# Altium PCB SKC_PCB.PcbDoc (part 1 of 3)
Units mm, origin at the board's own origin, x right, y up, seen from the top; angles counter-clockwise.
Board outline 160.02 x 100.08 mm, 2 copper layers (Top Layer, Bottom Layer); 399 components, 429 nets, 1319 pads, 182 vias.
Unrouted connection lines stored in the file: 43.
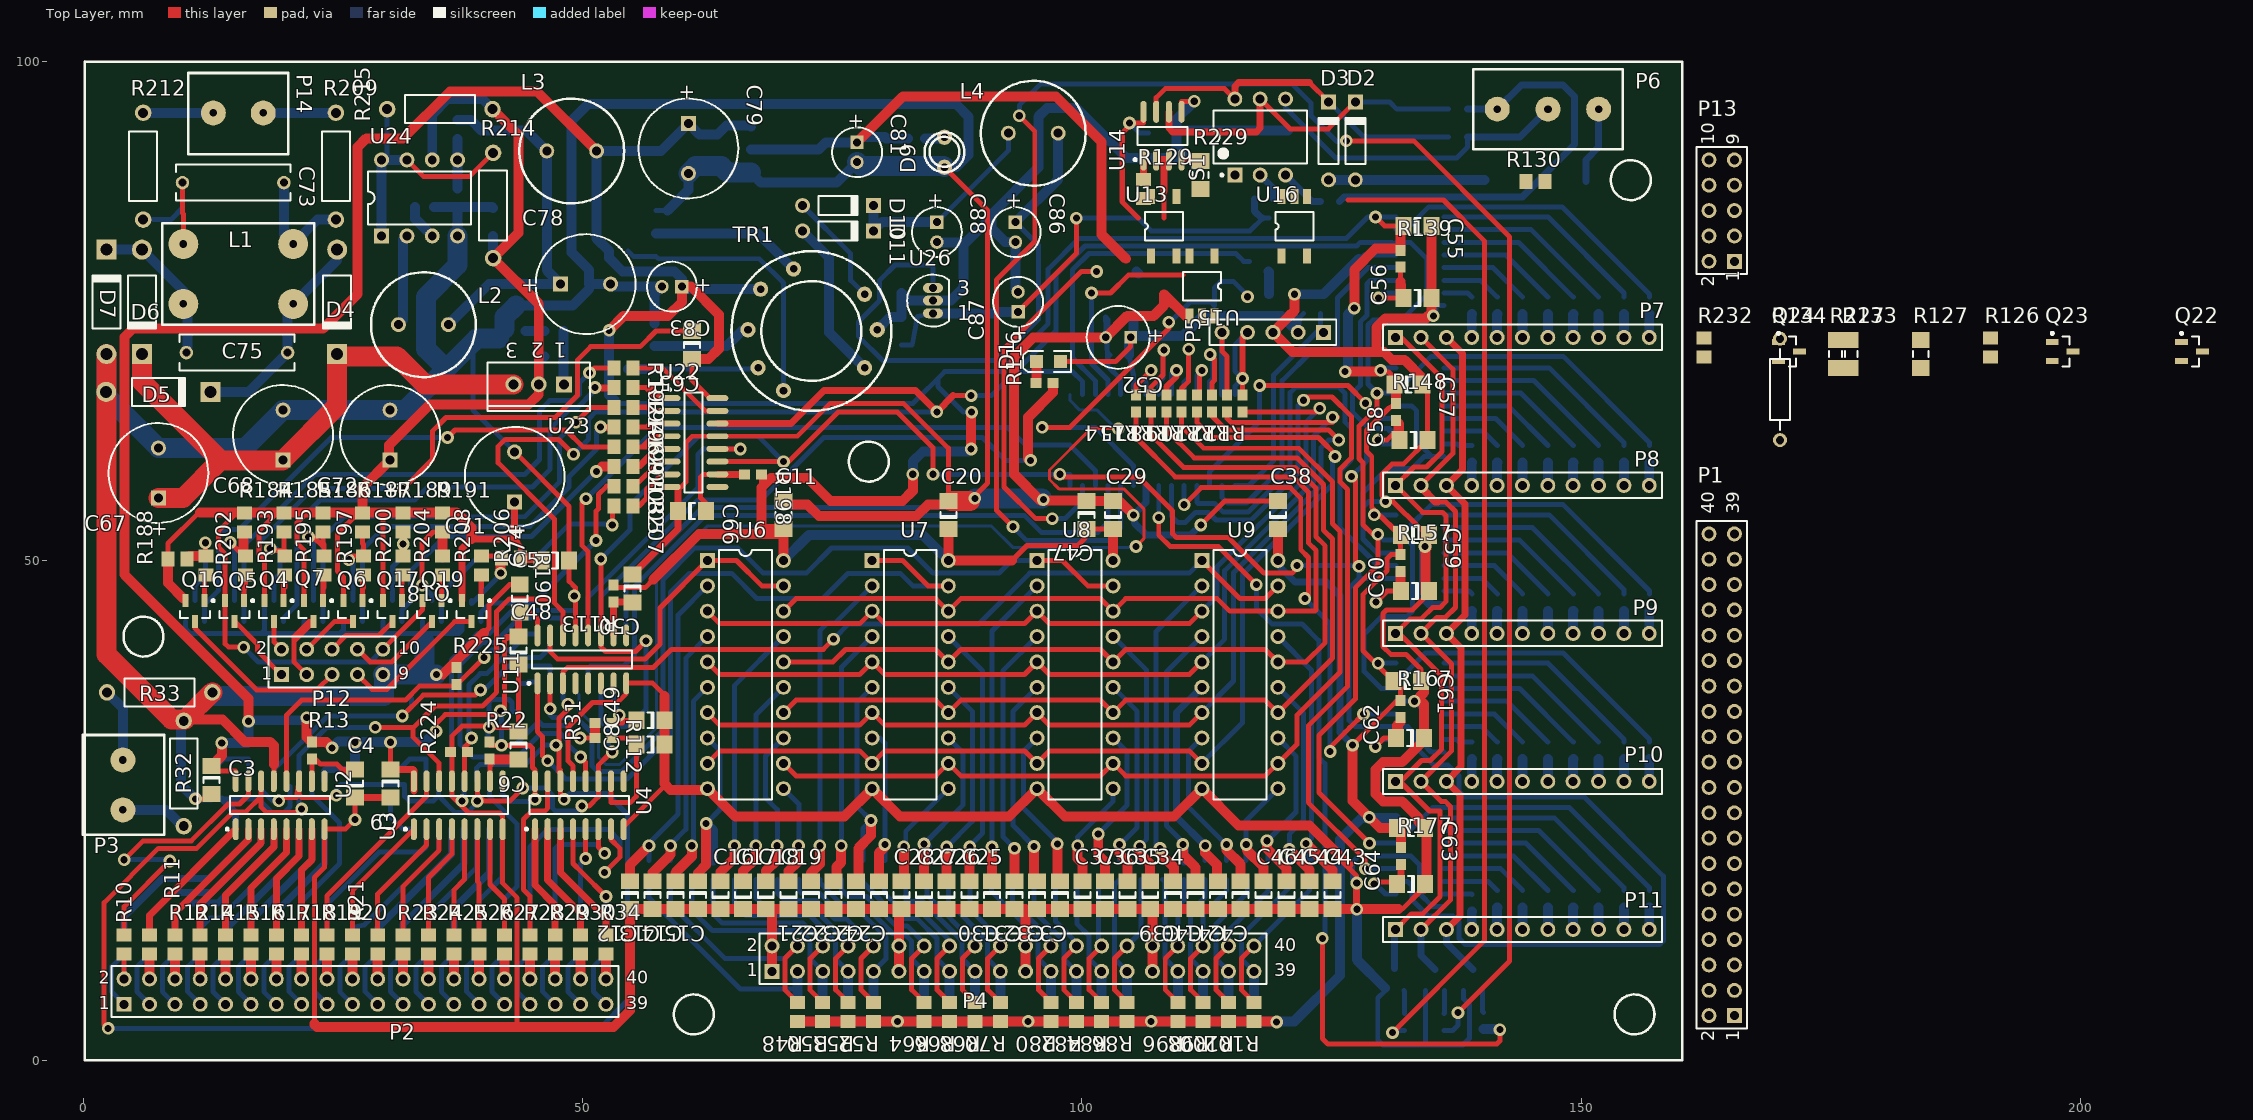
[diagram p0: Top Layer view]
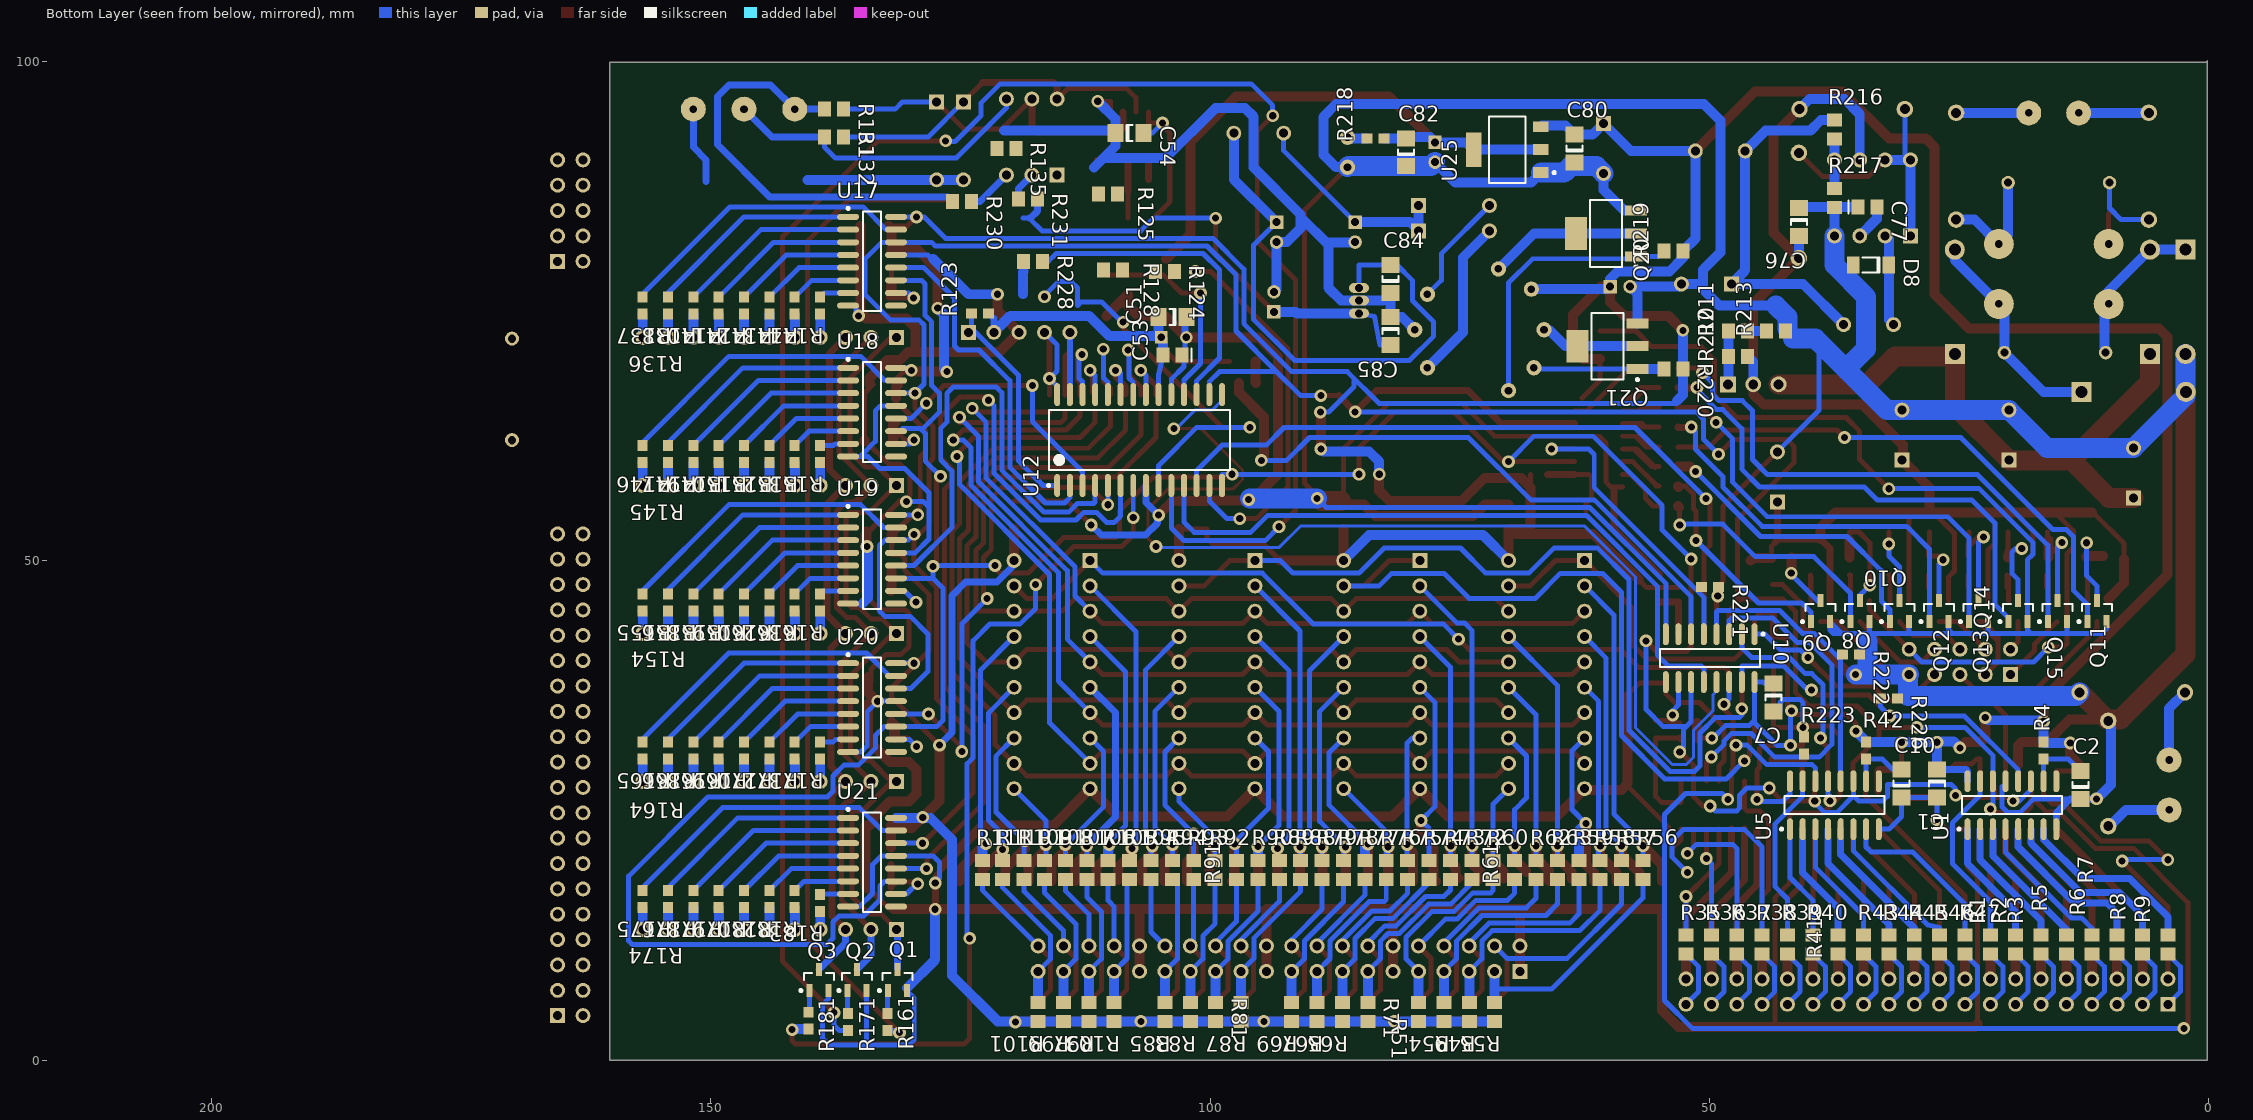
[diagram p1: Bottom Layer view, seen from below]

## Layer stack, top to bottom
Top Solder: solder mask 0.0102, Solder Resist, Dk 3.5
Top Layer: signal copper 0.0356
Dielectric1: dielectric 0.32, FR-4, Dk 4.8
Bottom Layer: signal copper 0.0356
Bottom Solder: solder mask 0.0102, Solder Resist, Dk 3.5

## Board outline
0.127,0 0.127,100.076 0.254,99.949 160.147,99.949 160.147,0 0.127,0

## Design rules (kind name [scope] priority, off if disabled: settings)
Clearance [All] p1: gap=0.254
PolygonConnect [All] p1: connectstyle=Relief reliefconductorwidth=0.254 reliefentries=4 polygonreliefangle="90 Angle" airgapwidth=0.254
RoutingVias [All] p1: holewidth=0.711 width=1.27 viastyle="Through Hole" minholewidth=0.711 minwidth=1.27 maxholewidth=0.711 maxwidth=1.27
SolderMaskExpansion [All] p1: expansion=0.102
Width [All] p1: maxlimit=3 minlimit=0.254 preferedwidth=0.7
29 further rules are at their usual default settings.

## Classes and differential pairs
component class SKC_ErrrorDisplay: C65 C66 P12 P13 Q4 Q5 Q6 Q7 Q8 Q9 Q10 Q11 Q12 Q13 Q14 Q15 Q16 Q17 Q18 Q19 R184 R185 R186 R187 R188 R189 R190 R191 R192 R193 R194 R195 R196 R197 R198 R199 R200 R201 R202 R203 R204 R205 R206 R207 R208 U22
component class SKC_Display: C55 C56 C57 C58 C59 C60 C61 C62 C63 C64 P7 P8 P9 P10 P11 Q1 Q2 Q3 R136 R137 R138 R139 R140 R141 R142 R143 R144 R145 R146 R147 R148 R149 R150 R151 R152 R153 R154 R155 R156 R157 R158 R159 R160 R161 R162 R163 R164 R165 R166 R167 R168 R169 R170 R171 R172 R173 R174 R175 R176 R177 R178 R179 R180 R181 R182 R183 U17 U18 U19 U20 U21
component class SKC_DataComm: C54 D2 D3 P6 Q22 Q23 Q24 R124 R125 R128 R129 R130 R131 R132 R135 R227 R228 R229 R230 R231 S1 U13 U14 U15 U16
component class SignalOutput: C1 C2 C3 C4 C5 C6 C7 C8 C9 C10 P1 P2 P3 R1 R2 R3 R4 R5 R6 R7 R8 R9 R10 R11 R12 R13 R14 R15 R16 R17 R18 R19 R20 R21 R22 R23 R24 R25 R26 R27 R28 R29 R30 R31 R32 R33 R34 R35 R36 R37 R38 R39 R40 R41 R42 R43 R44 R45 R46 R47 U1 U2 U3 U4 U5
component class SignalAndKeyController: C47 C48 C49 C50 C51 C52 C53 D1 P5 R112 R113 R114 R115 R116 R117 R118 R119 R120 R121 R122 R123 R221 R222 R223 R224 R225 R226 U10 U11 U12
component class KeyInput: C11 C12 C13 C14 C15 C16 C17 C18 C19 C20 C21 C22 C23 C24 C25 C26 C27 C28 C29 C30 C31 C32 C33 C34 C35 C36 C37 C38 C39 C40 C41 C42 C43 C44 C45 C46 P4 R48 R49 R50 R51 R52 R53 R54 R55 R56 R57 R58 R59 R60 R61 R62 R63 R64 R65 R66 R67 R68 R69 R70 R71 R72 R73 R74 R75 R76 R77 R78 R79 R80 R81 R82 R83 R84 R85 R86 R87 R88 R89 R90 R91 R92 R93 R94 R95 R96 R97 R98 R99 R100 R101 R102 R103 R104 R105 R106 R107 R108 R109 R110 R111 U6 U7 U8 U9
component class SKC_PSU: C67 C68 C71 C72 C73 C74 C75 C76 C77 C78 C79 C80 C81 C82 C83 C84 C85 C86 C87 C88 D4 D5 D6 D7 D8 D9 D10 D11 L1 L2 L3 L4 P14 Q20 Q21 R209 R210 R211 R212 R213 R214 R215 R216 R217 R218 R219 R220 TR1 U23 U24 U25 U26

## Components (designator, comment, footprint, x,y, rotation, side; value= is the part's Value field where it differs from the comment)
C1 "" 1206 27.178,27.686 r270 bottom
C2 "" 1206 12.827,27.559 r90 bottom
C3 "" 1206 12.827,28.067 r270 top
C4 "" 1206 27.178,27.686 r90 top
C5 "" 1206 43.688,46.228 r90 top
C6 "" 1206 43.561,31.496 r270 top
C7 "" 1206 43.561,36.322 r270 bottom
C8 "" 1206 56.769,31.623 r180 top
C9 "" 1206 30.734,27.686 r270 top
C10 "" 1206 30.734,27.686 r90 bottom
C11 "" 1206 70.104,54.61 r90 top
C12 "" 1206 54.737,16.51 r270 top
C13 "" 1206 57.003,16.51 r270 top
C14 "" 1206 59.268,16.51 r270 top
C15 "" 1206 61.534,16.51 r270 top
C16 "" 1206 63.799,16.51 r90 top
C17 "" 1206 66.065,16.51 r90 top
C18 "" 1206 68.33,16.51 r90 top
C19 "" 1206 70.596,16.51 r90 top
C20 "" 1206 86.614,54.61 r90 top
C21 "" 1206 72.861,16.51 r270 top
C22 "" 1206 75.127,16.51 r270 top
C23 "" 1206 77.392,16.51 r270 top
C24 "" 1206 79.658,16.51 r270 top
C25 "" 1206 88.72,16.51 r90 top
C26 "" 1206 86.454,16.51 r90 top
C27 "" 1206 84.189,16.51 r90 top
C28 "" 1206 81.923,16.51 r90 top
C29 "" 1206 103.124,54.61 r90 top
C30 "" 1206 90.985,16.51 r270 top
C31 "" 1206 93.251,16.51 r270 top
C32 "" 1206 95.516,16.51 r270 top
C33 "" 1206 97.782,16.51 r270 top
C34 "" 1206 106.844,16.51 r90 top
C35 "" 1206 104.578,16.51 r90 top
C36 "" 1206 102.313,16.51 r90 top
C37 "" 1206 100.047,16.51 r90 top
C38 "" 1206 119.634,54.61 r90 top
C39 "" 1206 109.109,16.51 r270 top
C40 "" 1206 111.375,16.51 r270 top
C41 "" 1206 113.64,16.51 r270 top
C42 "" 1206 115.906,16.51 r270 top
C43 "" 1206 125.095,16.51 r90 top
C44 "" 1206 122.798,16.51 r90 top
C45 "" 1206 120.5,16.51 r90 top
C46 "" 1206 118.203,16.51 r90 top
C47 "" 1206 100.457,54.61 r270 top
C48 "" 1206 43.561,41.021 r90 top
C49 "" 1206 56.769,34.036 r180 top
C50 "" 1206 54.991,47.244 r270 top
C51 "" 1206 103.759,74.422 r0 bottom
C52 "4u7" C 103.632,72.39 r180 top
C53 "" 0805 103.759,70.612 r0 bottom
C54 "100nF" 1206 108.077,92.837 r180 bottom
C55 "" 1206 133.604,83.566 r0 top
C56 "" 1206 133.604,76.327 r180 top
C57 "" 1206 132.715,67.691 r0 top
C58 "" 1206 133.223,62.103 r180 top
C59 "" 1206 133.35,52.578 r0 top
C60 "" 1206 133.35,46.99 r180 top
C61 "" 1206 132.588,37.973 r0 top
C62 "" 1206 132.842,32.258 r180 top
C63 "" 1206 132.969,23.241 r0 top
C64 "" 1206 132.969,17.653 r180 top
C65 "" 1206 60.96,71.628 r270 top
C66 "" 1206 60.96,54.991 r0 top
C67 "470uF" CAPPR5-10X16 7.493,58.801 r90 top
C68 "470uF" CAPPR5-10X16 19.981,62.611 r90 top
C71 "470uF" CAPPR5-10X16 43.18,58.42 r90 top
C72 "470uF" CAPPR5-10X16 30.692,62.611 r90 top
C73 "100nF" VP60-3.6 14.986,87.884 r0 top
C74 "" 1206 47.244,50.038 r180 top
C75 "220nF" VP60-3.6 15.367,70.866 r0 top
C76 "" 1206 41.021,83.947 r270 bottom
C77 "" 0805 34.163,85.471 r180 bottom
C78 "470uF" CAPPR5-10X16 50.292,77.724 r0 top
C79 "470uF" CAPPR5-10X16 60.579,91.313 r270 top
C80 "" 1206 63.5,91.313 r90 bottom
C81 "100uF" CAPPR2-5X11 77.47,90.932 r270 top
C82 "" 1206 80.391,90.932 r90 bottom
C83 "100uF" CAPPR2-5X11 58.928,77.47 r180 top
C84 "" 1206 81.915,78.232 r90 bottom
C85 "" 1206 81.915,73.025 r270 bottom
C86 "100uF" CAPPR2-5X11 93.345,82.931 r270 top
C87 "100uF" CAPPR2-5X11 93.599,75.946 r90 top
C88 "100uF" CAPPR2-5X11 85.471,82.931 r270 top
D1 "SKC_STATUS" 2.0X1.25X0.8 96.647,69.977 r180 top
D2 "13V" DO-35A 127.381,92.075 r90 top
D3 "13V" DO-35A 124.714,92.075 r90 top
D4 "1N4001" DO-41 25.4,75.946 r270 top
D5 "1N4001" DO-41 7.493,66.929 r0 top
D6 "1N4001" DO-41 5.842,75.946 r270 top
D7 "1N4001" DO-41 2.286,75.946 r90 top
D8 "BAV102" SOD80C 33.782,79.629 r180 bottom
D9 "3V3 POWER OK" "LED 3mm" 86.233,90.932 r90 top
D10 "1N4148" DO-35 75.565,85.598 r0 top
D11 "1N4148" DO-35 75.565,83.058 r0 top
L1 "CMC filter" "MREZNI FILTER" 15.494,78.74 r0 top
L2 "" RB5-10.5 34.036,73.66 r0 top
L3 "" RB5-10.5 48.895,91.059 r0 top
L4 "" RB5-10.5 95.123,92.837 r0 top
P1 "Header 20X2" HDR2X20 165.354,4.445 r90 top
P2 "Header 20X2" HDR2X20 4.064,5.588 r0 top
P3 "" "TERMINAL BLOK 2" 3.937,27.559 r0 top
P4 "Header 20X2" HDR2X20 68.961,8.89 r0 top
P5 "PICKIT3" HDR1X5 124.206,72.898 r180 top
P6 "RS485" "TERMINAL BLOK 3" 146.685,95.25 r270 top
P7 "DISPLAY 1" HDR1X11 131.428,72.39 r0 top
P8 "DISPLAY 2" HDR1X11 131.428,57.563 r0 top
P9 "DISPLAY 3" HDR1X11 131.428,42.735 r0 top
P10 "DISPLAY 4" HDR1X11 131.428,27.908 r0 top
P11 "DISPLAY 5" HDR1X11 131.428,13.081 r0 top
P12 "ERROR DISPLAY" HDR2X5 19.812,38.608 r0 top
P13 "ERROR DISPLAY" HDR2X5 165.354,80.01 r90 top
P14 "POWER" "TERMINAL BLOK 2" 15.494,94.869 r270 top
Q1 "BC817" SOT23_N 131.318,8.001 r90 bottom
Q2 "BC817" SOT23_N 135.382,8.001 r90 bottom
Q3 "BC817" SOT23_N 139.192,8.001 r90 bottom
Q4 "BC807" SOT23_N 19.086,44.958 r270 top
Q5 "BC807" SOT23_N 15.131,44.958 r270 top
Q6 "BC807" SOT23_N 26.997,44.958 r270 top
Q7 "BC807" SOT23_N 23.041,44.958 r270 top
Q8 "BC817" SOT23_N 34.907,44.958 r90 bottom
Q9 "BC817" SOT23_N 38.862,44.958 r90 bottom
Q10 "BC817" SOT23_N 30.952,44.958 r90 bottom
Q11 "BC817" SOT23_N 11.176,44.958 r90 bottom
Q12 "BC817" SOT23_N 26.997,44.958 r90 bottom
Q13 "BC817" SOT23_N 23.041,44.958 r90 bottom
Q14 "BC817" SOT23_N 19.086,44.958 r90 bottom
Q15 "BC817" SOT23_N 15.131,44.958 r90 bottom
Q16 "BC807" SOT23_N 11.176,44.958 r270 top
Q17 "BC807" SOT23_N 30.952,44.958 r270 top
Q18 "BC807" SOT23_N 38.862,44.958 r270 top
Q19 "BC807" SOT23_N 34.907,44.958 r270 top
Q20 "BCP56-10" SOT223_N 60.325,82.804 r0 bottom
Q21 "BCP56-10" SOT223_N 60.198,71.501 r0 bottom
Q22 "BC807-16" SOT23_N 211.201,70.993 r0 top
Q23 "BC807-16" SOT23_N 198.247,70.993 r0 top
Q24 "BC807" SOT23_N 170.815,70.993 r0 top
R1 "330R" ERA-0805 21.844,11.557 r90 bottom
R2 "330R" ERA-0805 19.304,11.557 r90 bottom
R3 "330R" ERA-0805 16.764,11.557 r90 bottom
R4 "100K" ERA-0603 16.51,30.988 r90 bottom
R5 "330R" ERA-0805 14.224,11.557 r90 bottom
R6 "330R" ERA-0805 11.684,11.557 r90 bottom
R7 "330R" ERA-0805 9.144,11.557 r90 bottom
R8 "330R" ERA-0805 6.604,11.557 r90 bottom
R9 "330R" ERA-0805 4.064,11.557 r90 bottom
R10 "330R" ERA-0805 4.064,11.557 r90 top
R11 "330R" ERA-0805 6.604,11.557 r90 top
R12 "330R" ERA-0805 9.144,11.557 r90 top
R13 "100K" ERA-0603 22.86,30.988 r90 top
R14 "330R" ERA-0805 11.684,11.557 r90 top
R15 "330R" ERA-0805 14.224,11.557 r90 top
R16 "330R" ERA-0805 16.764,11.557 r90 top
R17 "330R" ERA-0805 19.304,11.557 r90 top
R18 "330R" ERA-0805 21.844,11.557 r90 top
R19 "330R" ERA-0805 24.384,11.557 r90 top
R20 "330R" ERA-0805 26.924,11.557 r90 top
R21 "330R" ERA-0805 29.464,11.557 r90 top
R22 "100K" ERA-0603 40.64,30.988 r90 top
R23 "330R" ERA-0805 32.004,11.557 r90 top
R24 "330R" ERA-0805 34.544,11.557 r90 top
R25 "330R" ERA-0805 37.084,11.557 r90 top
R26 "330R" ERA-0805 39.624,11.557 r90 top
R27 "330R" ERA-0805 42.164,11.557 r90 top
R28 "330R" ERA-0805 44.704,11.557 r90 top
R29 "330R" ERA-0805 47.244,11.557 r90 top
R30 "330R" ERA-0805 49.784,11.557 r90 top
R31 "100K" ERA-0603 52.07,32.258 r180 top
R32 "15R" RD6.35x2.3 10.033,28.702 r270 top
R33 "15R" RD6.35x2.3 7.62,36.83 r0 top
R34 "330R" ERA-0805 52.324,11.557 r90 top
R35 "330R" ERA-0805 52.324,11.557 r90 bottom
R36 "330R" ERA-0805 49.784,11.557 r90 bottom
R37 "330R" ERA-0805 47.244,11.557 r90 bottom
R38 "330R" ERA-0805 44.704,11.557 r90 bottom
R39 "330R" ERA-0805 42.164,11.557 r90 bottom
R40 "330R" ERA-0805 39.624,11.557 r90 bottom
R41 "330R" ERA-0805 37.084,11.557 r90 bottom
R42 "100K" ERA-0603 34.29,30.988 r90 bottom
R43 "330R" ERA-0805 34.544,11.557 r90 bottom
R44 "330R" ERA-0805 32.004,11.557 r90 bottom
R45 "330R" ERA-0805 29.464,11.557 r90 bottom
R46 "330R" ERA-0805 26.924,11.557 r90 bottom
R47 "330R" ERA-0805 24.384,11.557 r90 bottom
R48 "10K" ERA-0805 71.501,4.826 r270 top
R49 "10K" ERA-0805 74.005,4.826 r270 bottom
R50 "10K" ERA-0805 74.005,4.826 r270 top
R51 "10K" ERA-0805 79.121,4.826 r270 bottom
R52 "10K" ERA-0805 79.121,4.826 r270 top
R53 "10K" ERA-0805 76.581,4.826 r270 top
R54 "10K" ERA-0805 76.581,4.826 r270 bottom
R55 "10K" ERA-0805 71.501,4.826 r270 bottom
R56 "10K" ERA-0805 56.642,19.05 r90 bottom
R57 "10K" ERA-0805 58.785,19.05 r90 bottom
R58 "10K" ERA-0805 60.927,19.05 r90 bottom
R59 "10K" ERA-0805 63.07,19.05 r90 bottom
R60 "10K" ERA-0805 71.64,19.05 r90 bottom
R61 "10K" ERA-0805 69.498,19.05 r90 bottom
R62 "10K" ERA-0805 67.355,19.05 r90 bottom
R63 "10K" ERA-0805 65.212,19.05 r90 bottom
R64 "10K" ERA-0805 84.201,4.826 r270 top
R65 "10K" ERA-0805 86.741,4.826 r270 bottom
R66 "10K" ERA-0805 86.741,4.826 r270 top
R67 "10K" ERA-0805 89.281,4.826 r270 bottom
R68 "10K" ERA-0805 89.281,4.826 r270 top
R69 "10K" ERA-0805 91.821,4.826 r270 bottom
R70 "10K" ERA-0805 91.821,4.826 r270 top
R71 "10K" ERA-0805 84.201,4.826 r270 bottom
R72 "10K" ERA-0805 73.783,19.05 r90 bottom
R73 "10K" ERA-0805 75.926,19.05 r90 bottom
R74 "10K" ERA-0805 78.068,19.05 r90 bottom
R75 "10K" ERA-0805 80.211,19.05 r90 bottom
R76 "10K" ERA-0805 82.353,19.05 r90 bottom
R77 "10K" ERA-0805 84.496,19.05 r90 bottom
R78 "10K" ERA-0805 86.639,19.05 r90 bottom
R79 "10K" ERA-0805 88.781,19.05 r90 bottom
R80 "10K" ERA-0805 96.901,4.826 r270 top
R81 "10K" ERA-0805 99.441,4.826 r270 bottom
R82 "10K" ERA-0805 99.441,4.826 r270 top
R83 "10K" ERA-0805 101.981,4.826 r270 bottom
R84 "10K" ERA-0805 101.981,4.826 r270 top
R85 "10K" ERA-0805 104.521,4.826 r270 bottom
R86 "10K" ERA-0805 104.521,4.826 r270 top
R87 "10K" ERA-0805 96.901,4.826 r270 bottom
R88 "10K" ERA-0805 90.924,19.05 r90 bottom
R89 "10K" ERA-0805 93.066,19.05 r90 bottom
R90 "10K" ERA-0805 95.209,19.05 r90 bottom
R91 "10K" ERA-0805 97.352,19.05 r90 bottom
R92 "10K" ERA-0805 99.494,19.05 r90 bottom
R93 "10K" ERA-0805 101.637,19.05 r90 bottom
R94 "10K" ERA-0805 103.779,19.05 r90 bottom
R95 "10K" ERA-0805 105.922,19.05 r90 bottom
R96 "10K" ERA-0805 109.601,4.826 r270 top
R97 "10K" ERA-0805 112.141,4.826 r270 bottom
R98 "10K" ERA-0805 112.141,4.826 r270 top
R99 "10K" ERA-0805 114.681,4.826 r270 bottom
R100 "10K" ERA-0805 114.681,4.826 r270 top
R101 "10K" ERA-0805 117.221,4.826 r270 bottom
R102 "10K" ERA-0805 117.221,4.826 r270 top
R103 "10K" ERA-0805 109.601,4.826 r270 bottom
R104 "10K" ERA-0805 108.065,19.05 r90 bottom
R105 "10K" ERA-0805 110.207,19.05 r90 bottom
R106 "10K" ERA-0805 112.35,19.05 r90 bottom
R107 "10K" ERA-0805 114.493,19.05 r90 bottom
R108 "10K" ERA-0805 116.586,19.05 r90 bottom
R109 "10K" ERA-0805 118.618,19.05 r90 bottom
R110 "10K" ERA-0805 120.777,19.05 r90 bottom
R111 "10K" ERA-0805 122.809,19.05 r90 bottom
R112 "100K" ERA-0603 52.07,33.782 r0 top
R113 "100K" ERA-0603 53.086,46.736 r270 top
R114 "1K" ERA-0603 105.41,65.786 r270 top
R115 "1K" ERA-0603 106.934,65.786 r270 top
R116 "330R" ERA-0603 96.266,67.818 r180 top
R117 "1K" ERA-0603 108.458,65.786 r270 top
R118 "1K" ERA-0603 109.982,65.786 r270 top
R119 "1K" ERA-0603 111.506,65.786 r270 top
R120 "1K" ERA-0603 113.03,65.786 r270 top
R121 "1K" ERA-0603 114.554,65.786 r270 top
R122 "1K" ERA-0603 116.078,65.786 r270 top
R123 "10K" ERA-0603 123.063,74.803 r0 bottom
R124 "4K7" ERA-0805 104.521,78.994 r180 bottom
R125 "2K2" ERA-0805 110.236,86.741 r180 bottom
R126 "330R" ERA-0805 191.008,71.374 r90 top
R127 "2K2" 8-1206 184.023,70.739 r90 top
R128 "4K7" ERA-0805 109.728,79.121 r180 bottom
R129 "220R" ERA-0805 106.172,87.249 r90 top
R130 "2K2" ERA-0805 145.415,88.011 r0 top
R131 "47R" ERA-0805 137.668,95.25 r180 bottom
R132 "47R" ERA-0805 137.668,92.456 r180 bottom
R133 "2K2" 8-1206 176.911,70.739 r90 top
R134 "100R" AXIAL-0.4 169.926,67.183 r90 top
R135 "4K7" ERA-0805 120.396,91.313 r180 bottom
R136 "100R" ERA-0603 156.845,75.565 r270 bottom
R137 "100R" ERA-0603 154.305,75.565 r270 bottom
R138 "100R" ERA-0603 151.765,75.565 r270 bottom
R139 "100K" ERA-0603 131.904,80.264 r90 top
R140 "100R" ERA-0603 149.225,75.565 r270 bottom
R141 "100R" ERA-0603 146.685,75.565 r270 bottom
R142 "100R" ERA-0603 144.145,75.565 r270 bottom
R143 "100R" ERA-0603 141.605,75.565 r270 bottom
R144 "100R" ERA-0603 139.065,75.565 r270 bottom
R145 "100R" ERA-0603 156.845,60.706 r270 bottom
R146 "100R" ERA-0603 154.305,60.706 r270 bottom
R147 "100R" ERA-0603 151.765,60.706 r270 bottom
R148 "100K" ERA-0603 131.445,64.897 r90 top
R149 "100R" ERA-0603 149.225,60.706 r270 bottom
R150 "100R" ERA-0603 146.685,60.706 r270 bottom
R151 "100R" ERA-0603 144.145,60.706 r270 bottom
R152 "100R" ERA-0603 141.605,60.706 r270 bottom
R153 "100R" ERA-0603 139.065,60.706 r270 bottom
R154 "100R" ERA-0603 156.845,45.847 r270 bottom
R155 "100R" ERA-0603 154.305,45.847 r270 bottom
R156 "100R" ERA-0603 151.765,45.847 r270 bottom
R157 "100K" ERA-0603 131.904,49.784 r90 top
R158 "100R" ERA-0603 149.225,45.847 r270 bottom
R159 "100R" ERA-0603 146.685,45.847 r270 bottom
R160 "100R" ERA-0603 144.145,45.847 r270 bottom
R161 "3K3" ERA-0603 132.334,3.81 r270 bottom
R162 "100R" ERA-0603 141.605,45.847 r270 bottom
R163 "100R" ERA-0603 139.065,45.847 r270 bottom
R164 "100R" ERA-0603 156.845,30.988 r270 bottom
R165 "100R" ERA-0603 154.305,30.988 r270 bottom
R166 "100R" ERA-0603 151.765,30.988 r270 bottom
R167 "100K" ERA-0603 131.904,35.179 r90 top
R168 "100R" ERA-0603 149.225,30.988 r270 bottom
R169 "100R" ERA-0603 146.685,30.988 r270 bottom
R170 "100R" ERA-0603 144.145,30.988 r270 bottom
R171 "3K3" ERA-0603 136.271,3.81 r270 bottom
R172 "100R" ERA-0603 141.605,30.988 r270 bottom
R173 "100R" ERA-0603 139.065,30.988 r270 bottom
R174 "100R" ERA-0603 156.845,16.129 r270 bottom
R175 "100R" ERA-0603 154.305,16.129 r270 bottom
R176 "100R" ERA-0603 151.765,16.129 r270 bottom
R177 "100K" ERA-0603 131.953,20.447 r90 top
R178 "100R" ERA-0603 149.225,16.129 r270 bottom
R179 "100R" ERA-0603 146.685,16.129 r270 bottom
R180 "100R" ERA-0603 144.145,16.129 r270 bottom
R181 "3K3" ERA-0603 140.208,3.937 r270 bottom
R182 "100R" ERA-0603 141.605,16.129 r270 bottom
R183 "100R" ERA-0603 139.065,15.748 r270 bottom
R184 "22K" ERA-0805 16.129,53.848 r90 top
R185 "22K" ERA-0805 20.066,53.848 r90 top
R186 "22K" ERA-0805 24.003,53.848 r90 top
R187 "22K" ERA-0805 27.94,53.848 r90 top
R188 "22K" ERA-0805 9.398,50.165 r180 top
R189 "22K" ERA-0805 32.004,53.848 r90 top
R190 "22K" ERA-0805 42.799,50.292 r0 top
R191 "22K" ERA-0805 35.941,53.848 r90 top
R192 "1K" ERA-0805 54.102,69.342 r0 top
R193 "10K" ERA-0805 16.205,49.53 r90 top
R194 "1K" ERA-0805 54.102,67.364 r0 top
R195 "10K" ERA-0805 20.151,49.53 r90 top
R196 "1K" ERA-0805 54.102,65.387 r0 top
R197 "10K" ERA-0805 24.096,49.53 r90 top
R198 "100K" ERA-0603 67.056,58.674 r0 top
R199 "1K" ERA-0805 54.102,63.409 r0 top
R200 "10K" ERA-0805 28.042,49.53 r90 top
R201 "1K" ERA-0805 54.102,61.432 r0 top
R202 "10K" ERA-0805 12.26,49.53 r90 top
R203 "1K" ERA-0805 54.102,59.454 r0 top
R204 "10K" ERA-0805 31.987,49.53 r90 top
R205 "1K" ERA-0805 54.102,57.477 r0 top
R206 "10K" ERA-0805 39.878,49.53 r90 top
R207 "1K" ERA-0805 54.102,55.499 r0 top
R208 "10K" ERA-0805 35.933,49.53 r90 top
R209 "1R" R6.35x2.3 25.273,89.535 r90 top
R210 "240R" ERA-0805 47.117,70.485 r0 bottom
R211 "2K" ERA-0805 47.117,73.025 r0 bottom
R212 "1R" R6.35x2.3 5.969,89.535 r90 top
R213 "2K2" ERA-0805 43.307,73.025 r0 bottom
R214 "0R47" RD6.35x2.3 41.021,85.598 r90 top
R215 "0R47" RD6.35x2.3 35.687,95.25 r180 top
R216 "3K6" ERA-0805 37.465,93.218 r90 bottom
R217 "1k2" ERA-0805 37.465,86.36 r90 bottom
R218 "330R" ERA-0603 83.439,92.329 r0 bottom
R219 "10K" ERA-0805 53.594,81.026 r0 bottom
R220 "10K" ERA-0805 53.594,69.215 r180 bottom
R221 "2K" ERA-0603 49.911,47.371 r180 bottom
R222 "2K" ERA-0603 35.814,40.64 r180 bottom
R223 "2K" ERA-0603 40.513,31.496 r90 bottom
R224 "2K" ERA-0603 37.592,30.861 r180 top
R225 "2K" ERA-0603 37.338,38.481 r90 top
R226 "2K" ERA-0603 32.004,36.195 r180 bottom
R227 "2K2" 8-1206 175.641,70.739 r90 top
R228 "330R" ERA-0805 117.729,80.01 r180 bottom
R229 "2K2" 8-1206 111.887,88.646 r90 top
R230 "120R" ERA-0805 124.841,85.979 r180 bottom
R231 "560R" ERA-0805 118.237,86.233 r180 bottom
R232 "560R" ERA-0805 162.306,71.374 r90 top
S1 "" DIP-6 117.856,92.456 r90 top
TR1 "Isolation trafo" "ISOLATION TRAFO 1" 72.644,73.152 r0 top
U1 "MC74HC595AD" 751B-05_N 19.685,25.527 r90 bottom
U2 "MC74HC595AD" 751B-05_N 19.685,25.527 r90 top
U3 "MC74HC595AD" 751B-05_N 37.529,25.527 r90 top
U4 "MC74HC595AD" 751B-05_N 49.657,25.527 r90 top
U5 "MC74HC595AD" 751B-05_N 37.465,25.527 r90 bottom
U6 "SN74ABT244N" N020 66.294,38.608 r270 top
U7 "SN74ABT244AN" N020 82.804,38.608 r270 top
U8 "SN74ABT244AN" N020 99.314,38.608 r270 top
U9 "SN74ABT244AN" N020 115.824,38.608 r270 top
U10 "MC74HC595AD" 751B-05_N 49.911,40.259 r270 bottom
U11 "MC74HC595AD" 751B-05_N 49.911,40.132 r90 top
U12 "PIC18F23K20-E/SO" SOIC-SO28_N 107.061,62.103 r90 bottom
U13 "TLP185" SOP4 106.934,80.518 r90 top
U14 "MAX485ESA" NSO8_N 108.077,92.583 r90 top
U15 "TLP112" SOP5 113.305,80.518 r270 top
U16 "TLP112" SOP5 120.015,80.518 r90 top
U17 "MC74HC595AD" 751B-05_N 133.858,80.01 r180 bottom
U18 "MC74HC595AD" 751B-05_N 133.858,64.897 r180 bottom
U19 "MC74HC595AD" 751B-05_N 133.858,50.165 r180 bottom
U20 "MC74HC595AD" 751B-05_N 133.858,35.306 r180 bottom
U21 "MC74HC595AD" 751B-05_N 133.858,19.812 r180 bottom
U22 "MC74HC595AD" 751B-05_N 61.087,61.849 r0 top
U23 "LM317T" 221A-04 45.593,67.691 r180 top
U24 "MC34063AD" 626-05 33.655,86.36 r0 top
U25 "REG1117-3.3" ZZ311 70.231,91.186 r90 bottom
U26 "MC78L05ABP" 29-04 85.09,76.073 r0 top

## Footprints (in the part's own frame and the unit in brackets; to place one, negate y for a bottom-side part, rotate by r counter-clockwise, add the part's x,y. Pads: shape width x height; smd on the part's side, far side on the other; paste and mask are expansions set on the pad)
2.0X1.25X0.8 [mm] "SM LED; 2 Flat Leads"
  rect 1.3x1.3 smd: 1(-1.2,0) 2(1.2,0)
  silkscreen extent -2.25,-1.05 2.55,1.05
8-1206 [mm] "Chip Resistor; Body 3.1 x 1.6 mm (LxW typ)"
  rect 1.6x1.8 smd: 1(-1.4,0) 2(1.4,0)
  silkscreen extent -0.3,-0.8 0.3,0.8
29-04 [mm] "TO, Flat Index; 3 In-Line, Axial Leads; Body Dia. 4.8mm; Leads 0.48 x 0.5 mm (max)"
  oval 2x1 hole 0.8: 1(0,-1.27) 2(0,0) 3(0,1.27)
  silkscreen extent -2.6,-2.6 1.6,2.6
221A-04 [mm] "TO, Thru-Hole, Vertical, Heatsink Mounted; 3 In-Line Leads; Pitch 2.54 mm"
  rect 1.6x1.6 hole 1: 1(-2.54,0)
  round 1.6 hole 1: 2(0,0) 3(2.54,0)
  silkscreen extent -5.15,-2.2 5.15,2.7
626-05 [mm] "DIP; 8 Leads; Row Spacing 7.62 mm; Pitch 2.54 mm"
  rect 1.5x1.5 hole 0.9: 1(-3.81,-3.81)
  round 1.5 hole 0.9: 2(-1.27,-3.81) 3(1.27,-3.81) 4(3.81,-3.81) 5(3.81,3.81) 6(1.27,3.81) 7(-1.27,3.81) 8(-3.81,3.81)
  silkscreen extent -5.15,-2.65 5.15,2.65
751B-05_N [mm] "SOIC, 16-Leads, Body 9.9x3.9mm, Pitch 1.27mm, IPC Medium Density"
  oval 2.2x0.6 smd: 1(-2.4,4.445) 2(-2.4,3.175) 3(-2.4,1.905) 4(-2.4,0.635) 5(-2.4,-0.635) 6(-2.4,-1.905) 7(-2.4,-3.175) 8(-2.4,-4.445) 9(2.4,-4.445) 10(2.4,-3.175) 11(2.4,-1.905) 12(2.4,-0.635) 13(2.4,0.635) 14(2.4,1.905) 15(2.4,3.175) 16(2.4,4.445)
  silkscreen extent -2.52,-5 0.9,5.42, body extent -2,-5 2,5, height 1.75
0805 [mm] "Chip Capacitor; Body 2.0 x 1.2 mm (LxW typ)"
  rect 1.3x1.5 smd: 1(-0.95,0) 2(0.95,0)
  silkscreen extent -1.9,-0.65 -1.9,0.65
1206 [mm] "Chip Capacitor; Body 3.2 x 1.6 mm (LxW typ)"
  rect 1.6x1.8 smd: 1(-1.4,0) 2(1.4,0)
  silkscreen extent -0.3,-0.8 0.3,0.8
AXIAL-0.4 [mm] "Axial Device, Thru-Hole; 2 Leads; 0.4 in Pin Spacing"
  round 1.4 hole 0.85: 1(-5.08,0) 2(5.08,0)
  silkscreen extent -4.06,-1.02 4.06,1.02
C [mm] "Capacitor, Electrolytic, Radial; Body 6.3 x 6.8 mm (Dia.xH typ); Pin Spacing 2.5 mm (typ)"
  rect 1.25x1.25 hole 0.75: 1(-1.25,0)
  round 1.25 hole 0.75: 2(1.25,0)
  silkscreen extent -3.15,-3.15 3.15,3.15
CAPPR2-5X11 [mm] "Capacitor, Electrolytic, Radial; Body 5 x 11 mm (Dia.xH typ); Pin Spacing 2 mm (typ)"
  rect 1.35x1.35 hole 0.8: 1(-1,0)
  round 1.35 hole 0.8: 2(1,0)
  silkscreen extent -2.5,-2.5 2.5,2.5
CAPPR5-10X16 [mm] "Capacitor, Electrolytic, Radial; Body 10 x 16 mm (Dia.xH typ); Pin Spacing 5 mm (typ)"
  rect 1.5x1.5 hole 0.9: 1(-2.5,0)
  round 1.5 hole 0.9: 2(2.5,0)
  silkscreen extent -5,-5 5,5
DIP-6 [mm] "DIP; 6 Leads; Row Spacing 7.62 mm; Pitch 2.54 mm"
  rect 1.5x1.5 hole 0.9: 1(-3.81,2.54)
  round 1.5 hole 0.9: 2(-3.81,0) 3(-3.81,-2.54) 4(3.81,-2.54) 5(3.81,0) 6(3.81,2.54)
  silkscreen extent -3.93,-4.7 2.65,4.7, body extent -3.55,-4.7 3.55,4.7, height 5.46
DO-35 [mm] "Diode, Axial; Body 3.8 x 1.9 mm (LxDia. max), Lead Dia. 0.53 mm (max)"
  round 1.5 hole 0.9: 1(-3.55,0)
  rect 1.5x1.5 hole 0.9: 2(3.55,0)
  silkscreen extent -1.95,-0.95 2.05,0.95
DO-35A [mm] "Diode, Axial; Body 4.6 x 1.9 mm (LxDia. max), Lead Dia. 0.53 mm (max)"
  round 1.5 hole 0.9: 1(-3.9,0)
  rect 1.5x1.5 hole 0.9: 2(3.9,0)
  silkscreen extent -2.3,-1 2.4,1
DO-41 [mm] "Diode, Axial; Body 5.2 x 2.7 mm (LxDia. max), Lead Dia. 0.86 mm (max)"
  round 2 hole 1.2: 1(-5.23,0)
  rect 2x2 hole 1.2: 2(5.23,0)
  silkscreen extent -2.65,-1.4 2.75,1.4
ERA-0603 [mm] "Chip Resistor; Body 1.6 x 0.8 mm (LxW typ)"
  rect 1.1x1 smd: 1(-0.85,0) 2(0.85,0)
ERA-0805 [mm] "Chip Resistor; Body 2 x 1.3 mm (LxW typ)"
  rect 1.3x1.5 smd: 1(-0.95,0) 2(0.95,0)
HDR1X5 [mm] "Connector; Header; 5 Position"
  rect 1.5x1.5 hole 0.9: 1(0,0)
  round 1.5 hole 0.9: 2(2.54,0) 3(5.08,0) 4(7.62,0) 5(10.16,0)
  silkscreen extent -1.27,-1.27 11.43,1.27
HDR1X11 [mm] "Connector; Header; 11 Position"
  rect 1.5x1.5 hole 0.9: 1(0,0)
  round 1.5 hole 0.9: 2(2.54,0) 3(5.08,0) 4(7.62,0) 5(10.16,0) 6(12.7,0) 7(15.24,0) 8(17.78,0) 9(20.32,0) 10(22.86,0) 11(25.4,0)
  silkscreen extent -1.27,-1.27 26.67,1.27
HDR2X5 [mm] "Connector; Header; 5x2 Position"
  rect 1.5x1.5 hole 0.9: 1(0,0)
  round 1.5 hole 0.9: 2(0,2.54) 3(2.54,0) 4(2.54,2.54) 5(5.08,0) 6(5.08,2.54) 7(7.62,0) 8(7.62,2.54) 9(10.16,0) 10(10.16,2.54)
  silkscreen extent -1.27,-1.27 11.43,3.81
HDR2X20 [mm] "Connector; Header; 20x2 Position"
  rect 1.5x1.5 hole 0.9: 1(0,0)
  round 1.5 hole 0.9: 2(0,2.54) 3(2.54,0) 4(2.54,2.54) 5(5.08,0) 6(5.08,2.54) 7(7.62,0) 8(7.62,2.54) 9(10.16,0) 10(10.16,2.54) 11(12.7,0) 12(12.7,2.54) 13(15.24,0) 14(15.24,2.54) 15(17.78,0) 16(17.78,2.54) 17(20.32,0) 18(20.32,2.54) 19(22.86,0) 20(22.86,2.54) 21(25.4,0) 22(25.4,2.54) 23(27.94,0) 24(27.94,2.54) 25(30.48,0) 26(30.48,2.54) 27(33.02,0) 28(33.02,2.54) 29(35.56,0) 30(35.56,2.54) 31(38.1,0) 32(38.1,2.54) 33(40.64,0) 34(40.64,2.54) 35(43.18,0) 36(43.18,2.54) 37(45.72,0) 38(45.72,2.54) 39(48.26,0) 40(48.26,2.54)
  silkscreen extent -1.27,-1.27 49.53,3.81
"ISOLATION TRAFO 1" [mil] "SMPS ferit toroid trafo"
  round 60 hole 30: 1(-100,-240) 2(-200,-150) 3(-240,0) 4(-190,160) 5(-60,240) 6(220,140) 7(270,0) 8(220,-150)
  silkscreen extent -305,-320 325,310
"LED 3mm" [mil] "LED 3mm"
  round 60 hole 30: 1(-59.06,0) 2(59.06,0)
  silkscreen extent -79,-79 79,79
"MREZNI FILTER" [mm] "Filter mrežnih smetnji"
  round 3 hole 0.762: 1(5.5,3) 2(5.5,-3) 3(-5.5,3) 4(-5.5,-3)
  silkscreen extent -7.62,-5.08 7.62,5.08
N020 [mm] "DIP; 20 Leads; Row Spacing 7.62 mm; Pitch 2.54 mm"
  rect 1.5x1.5 hole 0.9: 1(-11.43,-3.81)
  round 1.5 hole 0.9: 2(-8.89,-3.81) 3(-6.35,-3.81) 4(-3.81,-3.81) 5(-1.27,-3.81) 6(1.27,-3.81) 7(3.81,-3.81) 8(6.35,-3.81) 9(8.89,-3.81) 10(11.43,-3.81) 11(11.43,3.81) 12(8.89,3.81) 13(6.35,3.81) 14(3.81,3.81) 15(1.27,3.81) 16(-1.27,3.81) 17(-3.81,3.81) 18(-6.35,3.81) 19(-8.89,3.81) 20(-11.43,3.81)
  silkscreen extent -12.5,-2.65 12.5,2.65
NSO8_N [mm] "SOIC, 8-Leads, Body 4.9x3.9mm, Pitch 1.27mm, IPC Medium Density"
  oval 2.2x0.6 smd: 1(-2.4,1.905) 2(-2.4,0.635) 3(-2.4,-0.635) 4(-2.4,-1.905) 5(2.4,-1.905) 6(2.4,-0.635) 7(2.4,0.635) 8(2.4,1.905)
  silkscreen extent -2.52,-2.5 0.9,2.88, body extent -2,-2.5 2,2.5, height 1.75
R6.35x2.3 [mm] "Resistor, Axial; Body 7 x 2.8 mm (LxDia. max), Lead Dia. 0.7 mm (max)"
  round 1.65 hole 1: 1(-5.35,0) 2(5.35,0)
  silkscreen extent -3.5,-1.4 3.5,1.4
RB5-10.5 [mm] "Capacitor (Radial); 2 Leads"
  round 1.5 hole 0.9: 1(-2.5,0) 2(2.5,0)
  silkscreen extent -5.25,-5.25 5.25,5.25
RD6.35x2.3 [mm] "Resistor, Axial; Body 7 x 2.8 mm (LxDia. max), Lead Dia. 0.65 mm (max)"
  round 1.65 hole 1: 1(-5.275,0) 2(5.275,0)
  silkscreen extent -3.5,-1.4 3.5,1.4
SOD80C [mm] "Metal Electrode Face (MELF) Diode; Body 3.5 x 1.6 mm (LxDia)"
  rect 1.25x1.7 smd: 1(-1.775,0) 2(1.775,0)
  silkscreen extent -0.85,-0.75 0.85,0.75
SOIC-SO28_N [mm] "SOIC, 28-Leads, Body 17.9x7.5mm, Pitch 1.27mm, IPC Medium Density"
  oval 2.3x0.6 smd: 1(-4.55,8.255) 2(-4.55,6.985) 3(-4.55,5.715) 4(-4.55,4.445) 5(-4.55,3.175) 6(-4.55,1.905) 7(-4.55,0.635) 8(-4.55,-0.635) 9(-4.55,-1.905) 10(-4.55,-3.175) 11(-4.55,-4.445) 12(-4.55,-5.715) 13(-4.55,-6.985) 14(-4.55,-8.255) 15(4.55,-8.255) 16(4.55,-6.985) 17(4.55,-5.715) 18(4.55,-4.445) 19(4.55,-3.175) 20(4.55,-1.905) 21(4.55,-0.635) 22(4.55,0.635) 23(4.55,1.905) 24(4.55,3.175) 25(4.55,4.445) 26(4.55,5.715) 27(4.55,6.985) 28(4.55,8.255)
  silkscreen extent -4.67,-9.05 3,9.23, body extent -3.8,-9.06 3.8,9.06, height 2.65
SOP4 [mm] "Mini flat coupler"
  rect 1.5x0.8 smd: 1(0,0) 3(0,-2.54) 4(6,-2.54) 6(6,0)
  silkscreen extent 1.58,-3.17 4.42,0.64, body extent 1.02,-3.3 5.08,0.76, height 2
SOP5 [mm] "Mini flat coupler"
  rect 1.5x0.8 smd: 1(0,0) 3(0,-2.54) 4(6,-2.54) 5(6,-1.27) 6(6,0)
  silkscreen extent 1.58,-3.17 4.42,0.64, body extent 1.02,-3.3 5.08,0.76, height 2
SOT23_N [mm] "SOT23, 3-Leads, Body 2.9x1.3mm, Pitch 0.95mm, Lead Span 2.3mm, IPC Medium Density"
  rect 1.3x0.6 smd: 1(-1.05,0.95) 2(-1.05,-0.95) 3(1.05,0)
  silkscreen extent -1.17,-1.5 0.7,1.93, body extent -0.7,-1.5 0.7,1.5, height 1.1
SOT223_N [mm] "SOT223, 4-Leads, Body 6.5x3.5mm, Pitch 2.3mm, Lead Span 7mm, IPC Medium Density"
  rect 2.2x1 smd: 1(-3,2.3) 2(-3,0) 3(-3,-2.3)
  rect 2.2x3.3 smd: 4(3,0)
  silkscreen extent -3.12,-3.35 1.6,3.47, body extent -1.85,-3.35 1.85,3.35, height 1.8
"TERMINAL BLOK 2" [mm] "Terminal blok 3,5mm"
  round 2.5 hole 0.762: 1(0,-2.5) 2(0,2.5)
  silkscreen extent -4,-5 4.13,5
"TERMINAL BLOK 3" [mm] "Terminal blok konektor 3 pina"
  round 2.5 hole 0.762: 1(0,5.08) 2(0,0) 3(0,-5.08)
  silkscreen extent -4,-7.5 4,7.5
VP60-3.6 [mm] "Capacitor, Ceramic, Thru-Hole, Dipped Radial; Body 11.5 x 3.6 mm (WxT) Pin Spacing 10.16 mm (typ)"
  round 1.35 hole 0.8: 1(-5.08,0) 2(5.08,0)
  silkscreen extent -5.75,-1.8 5.75,1.8
ZZ311 [mm] "SOT-223/SC-73; 4 Leads; Body 6.7 x 7.3 mm, inc. leads (LxW max)"
  rect 1.1x1.55 smd: 1(-2.3,-3.375) 2(0,-3.375) 3(2.3,-3.375)
  rect 3.45x1.55 smd: 4(0,3.375)
  silkscreen extent -3.35,-4.82 3.35,1.85

## Part data
C1 C2 C3 C4 C5 C6 C7 C8 C9 C10 C11 C12 C13 C14 C15 C16 C17 C18 C19 C20 C21 C22 C23 C24 C25 C26 C27 C28 C29 C30 C31 C32 C33 C34 C35 C36 C37 C38 C39 C40 C41 C42 C43 C44 C45 C46 C47 C48 C49 C50 C51 C54 C55 C56 C57 C58 C59 C60 C61 C62 C63 C64 C65 C66 C74 C76 C80 C82 C84 C85: library part C1206, "Ceramic Chip Capacitor - Standard"
C52: library part 94SC475X0025CBP, "Solid Aluminum Capacitor with Organic Semiconductor Electrolyte: 4.7uF, 25V, Bulk Pack"
C53 C77: library part C0805, "Ceramic Chip Capacitor - Standard"
C67 C68 C71 C72 C78 C79: library part EKA00DD347F00, "Aluminum Electrolytic Capacitor, Radial Style with Long Leads: 470uF, 35V"
C73 C75: library part VP60BA683KA, "Dipped Radial Multilayer Ceramic Capacitor COG (NPO): 68nF, 50/63V"
C81 C83 C86 C87 C88: library part EKA00AA310D00, "Aluminum Electrolytic Capacitor, Radial Style with Long Leads: 100uF, 16V"
D1: library part HSMA-S670, "SMT Top Mount Chip LED, Amber"
D2 D3: library part "D Zener", "Zener Diode"
D4 D5 D6 D7: library part "Diode 1N4007", "1 Amp General Purpose Rectifier"
D8: "General-purpose Diode"
D9: library part "LED 3mm"
D10 D11: library part "Diode 1N4148", "High Conductance Fast Diode"
L1: library part "MREZNI FILTER"
L2 L3 L4: library part PCMC063T-R82MN, "SMT Power Choke Coil; Size 7.3×6.6×3.0mm, ±20% Tolerance, 0.82uH, 13A"
P1 P2 P4: "Header, 20-Pin, Dual row"
P3: library part "Terminal blok 2 pina", "Terminal blok 2"
P5: library part "Header 5", "Header, 5-Pin"
P6: library part "TERMINAL BLOK 3", "3 pinski terminal blok konektor"
P7 P8 P9 P10 P11: library part "Header 11", "Header, 11-Pin"
P12 P13: library part "Header 5X2", "Header, 5-Pin, Dual row"
P14: library part "TERMINAL BLOK 2", "Terminal blok konektor 3,5 mm"
Q1 Q2 Q3: "NPN General-purpose Transistor"
Q4 Q5 Q6 Q7 Q16 Q17 Q18 Q19 Q22 Q23: "PNP General-purpose Transistor"
Q8 Q9 Q10 Q11 Q12 Q13 Q14 Q15: library part BC817-16, "NPN General-purpose Transistor"
Q20 Q21: "NPN Medium Power Transistor"
Q24: library part BC807-16, "PNP General-purpose Transistor"
R1 R2 R3 R5 R6 R7 R8 R9 R10 R11 R12 R14 R15 R16 R17 R18 R19 R20 R21 R23 R24 R25 R26 R27 R28 R29 R30 R34 R35 R36 R37 R38 R39 R40 R41 R43 R44 R45 R46 R47 R48 R49 R50 R51 R52 R53 R54 R55 R56 R57 R58 R59 R60 R61 R62 R63 R64 R65 R66 R67 R68 R69 R70 R71 R72 R73 R74 R75 R76 R77 R78 R79 R80 R81 R82 R83 R84 R85 R86 R87 R88 R89 R90 R91 R92 R93 R94 R95 R96 R97 R98 R99 R100 R101 R102 R103 R104 R105 R106 R107 R108 R109 R110 R111 R126 R184 R185 R186 R187 R188 R189 R190 R191 R192 R193 R194 R195 R196 R197 R199 R200 R201 R202 R203 R204 R205 R206 R207 R208 R228: library part ERA6Y, "Rectangular Thick Film Chip Resistor, 10 Ohm to 1M Ohm Range, 0.1% and 0.5% Tolerance, 0805 Size, 0.1 W"
R4 R13 R22 R31 R42 R112 R113 R114 R115 R116 R117 R118 R119 R120 R121 R122 R123 R136 R137 R138 R139 R140 R141 R142 R143 R144 R145 R146 R147 R148 R149 R150 R151 R152 R153 R154 R155 R156 R157 R158 R159 R160 R161 R162 R163 R164 R165 R166 R167 R168 R169 R170 R171 R172 R173 R174 R175 R176 R177 R178 R179 R180 R181 R182 R183 R198 R218 R221 R222 R223 R224 R225 R226: library part ERA3Y, "Rectangular Thick Film Chip Resistor, 10 Ohm to 330k Ohm Range, 0.1% and 0.5% Tolerance, 0603 Size, 0.063 W"
R32 R33: library part ERD25T, "Carbon Film Resistor, 1 Ohm to 3.3M Ohm Range, 5% Tolerance, 0.25 W"
R124 R125 R128 R129 R130 R131 R132 R135 R210 R211 R213 R216 R217 R219 R220 R230 R231 R232: library part ERAS, "Metal Film Thermosensitive Chip Resistor, 0.56 Ohm to 10k Ohm Range, 5% Tolerance, 0805 Size, 0.1 W"
R127 R133 R227 R229: library part ERJ8GE, "Thick Film Chip Resistor, 1 Ohm to 10M Ohm Range, 5% Tolerance, 1206 Size, 0.25 W"
R134: library part Res2, "Resistor"
R209 R212: library part ERG12, "Metal Oxide Film Resistor, 0.1 Ohm to 47k Ohm Range, 2% and 5% Tolerance, 0.5 W"
R214 R215: library part ERDS1T, "Carbon Film Resistor, 1 Ohm to 3.3M Ohm Range, 5% Tolerance, 0.5 W"
S1: library part "SW DIP-3", "DIP Switch, 3 Position, SPST"
TR1: library part "ISOLATION TRAFO 1", "SMPS small ferite toroide trafo"
U1 U2 U3 U4 U5 U10 U11 U17 U18 U19 U20 U21 U22: "8-Bit Serial-Input/Serial or Prallel-Output Shift Register with Latched 3-State Outputs"
U6 U7 U8 U9: "Octal Buffer/Driver with 3-State Outputs"
U12: "Flash Microcontroller with nanoWatt XLP Technology, 28-pin SOIC, Extended Temperature"
U13: "4 Pin Mini Flat Pack Optocoupler"
U14: "Low-Power, Slew-Rate-Limited RS-485/RS-422 Transceiver"
U15 U16: "5 Pin Mini Flat Pack Optocoupler"
U23: "3-Terminal Adjustable Positive Voltage Regulator"
U24: "DC-to-DC Converter Control Circuit"
U25: "800mA and 1A Low Dropout Positive Regulator 2.85V, 3.3V, 5V, and Adjustable"
U26: "3-Terminal Low-Current Positive Fixed Voltage Regulator"

## Via types
v1: diameter 1.27, hole 0.711, Top Layer to Bottom Layer, 182 vias

## Nets (pads, with @x,y where several pads share a name; then routed paths per layer and width w, separated by ;. In a path a pad name is that pad's centre, name@x,y a point inside that pad or via, vN(x,y) a via of type N, cw(c..) or ccw(c..) an arc to the next point about the centre after c; other vN are vias at no path point)
+3V3_SKC: C51.2 C52.1 C53.2 C81.1 C82.2 D1.1 P5.2 Q23.2 R123.1 R128.1 R218.1 U12.20 U15.6 U25.2 U25.4 | length 94.5
  Top Layer w0.5: D1.1@98.044,69.977 103.378,69.977 104.882,71.481 C52.1@104.882,72.39
  Top Layer w1: C81.1@77.47,91.932 82.058,96.52 97.409,96.52 101.981,91.948 101.981,82.677 104.394,80.264
  Bottom Layer w0.5: C53.2@104.709,70.612 105.156,68.58 U12.20@105.156,66.653 ; C52.1@105.009,72.517 C52.1@105.159,72.667 ; 121.705,74.295 R123.1@122.213,74.803
  Bottom Layer w0.7: P5.2@121.666,72.898 121.666,74.256 121.705,74.295
  Bottom Layer w1: U25.2@66.856,91.186 U25.4@73.606,91.186 74.352,91.932 C81.1@77.47,91.932 77.994,92.456 80.267,92.456 C82.2@80.391,92.332 80.394,92.329 R218.1@82.589,92.329 ; C53.2@104.709,70.612 104.709,72.217 C52.1@104.882,72.39 105.009,72.517 110.05,72.517 110.128,72.596 110.188,72.596 112.141,74.549 115.951,74.549 ; C52.1@105.159,72.667 C51.2@105.159,74.422 ; 115.443,74.549 120.015,74.549 P5.2@121.666,72.898
+5V_DC: C54.2 C85.2 C87.1 Q22.2 Q24.2 R124.1 R135.1 R231.2 U14.8 U16.6 U26.1 | length 71.3
  Top Layer w0.5: C87.1@93.599,74.946 99.441,80.788 v1(99.441,84.328) ; v1(104.775,93.853) v1@105.042,93.853 ; 105.664,84.328 104.051,85.941 ; U14.8@106.172,94.983 106.172,93.853 v1@105.042,93.853 ; 104.051,85.941 104.051,92.862 ; 104.051,85.941 104.013,85.979 104.013,92.824 104.051,92.862 ; 104.051,92.862 v1@105.042,93.853
  Bottom Layer w0.5: C85.2@81.915,71.625 83.004,71.625 83.515,74.498 U26.1@85.09,74.803 ; v1(99.441,84.328) 105.664,84.328 106.934,83.058 116.84,83.058 118.11,84.328 118.745,84.328 ; v1(104.775,93.853) 105.791,92.837 C54.2@106.677,92.837
  Bottom Layer w0.7: R231.2@117.287,86.233 117.287,85.024 117.983,84.328 118.11,84.328
  Bottom Layer w1: U26.1@85.09,74.803 91.313,74.803 91.456,74.946 C87.1@93.599,74.946 ; R124.1@105.471,78.994 R124.1@105.664,78.801
+5V_SKC: C1.1 C3.1 C5.1 C7.1 C9.1 C11.1 C20.1 C29.1 C38.1 C47.2 C48.2 C55.1 C57.1 C59.1 C61.1 C63.1 C65.2 C79.1 C80.2 C83.1 L3.2 R4.2 R13.2 R22.2 R31.2 R42.2 R48.2 R49.2 R50.2 R51.2 R52.2 R53.2 R54.2 R55.2 R64.2 R65.2 R66.2 R67.2 R68.2 R69.2 R70.2 R71.2 R80.2 R81.2 R82.2 R83.2 R84.2 R85.2 R86.2 R87.2 R96.2 R97.2 R98.2 R99.2 R100.2 R101.2 R102.2 R103.2 R112.1 R113.1 R139.2 R148.2 R157.2 R167.2 R177.2 R198.2 R219.1 R220.2 TR1.4 U1.16 U2.16 U3.16 U4.16 U5.16 U6.20 U7.20 U8.20 U9.20 U10.16 U11.16 U17.16 U18.16 U19.16 U20.16 U21.16 U22.16 U25.3 | length 755.5
  Top Layer w0.5: C3.1@12.827,28.959 15.24,28.959 U2.16@15.24,27.927 ; C9.1@30.734,29.086 v1(30.734,31.838) ; v1(35.306,32.944) 35.306,33.68 36.216,34.591 41.322,34.591 v1@42.139,35.408 ; R22.2@40.64,31.838 R22.2@40.64,31.521 ; v1(41.758,34.976) 42.139,35.357 v1@42.139,35.408 ; v1(41.859,31.521) R22.2@40.64,31.521 ; C5.1@43.688,44.828 44.834,44.828 45.466,44.196 U11.16@45.466,42.532 ; v1(45.212,26.111) U4.16@45.212,27.927 45.212,29.058 44.965,29.305 44.965,31.242 44.711,31.496 41.859,31.496 R22.2@40.64,31.521 ; v1@49.682,32.207 v1(49.733,32.258) R31.2@51.22,32.258 ; R113.1@53.086,47.586 53.086,47.32 56.259,47.32 57.072,48.133 ; C65.2@60.96,70.228 60.96,68.072 U22.16@62.738,66.294 ; 67.906,57.365 R198.2@67.906,58.674 ; 92.996,50.038 94.495,51.537 99.568,51.537 100.33,52.299 100.33,53.21 C29.1@103.124,53.21 ; v1(127.102,31.547) R167.2@131.744,36.189 ; v1(129.286,54.61) 129.755,54.61 131.805,52.56 C59.1@131.869,52.497 ; v1@129.413,39.751 131.904,37.26 R167.2@131.904,36.029 ; v1(129.413,84.455) 130.302,83.566 C55.1@132.204,83.566 ; v1(129.921,69.088) 129.819,69.088 129.946,68.961 129.972,68.935 130.709,68.935 131.315,68.329 C57.1@131.315,67.691 131.315,67.567 131.315,66.78 131.444,66.651 131.445,66.65 R148.2@131.445,65.747 130.755,65.309 128.508,63.062 128.508,60.983 129.032,60.459 129.032,55.348 129.52,54.859 131.885,52.64 131.904,52.621 C59.1@131.95,52.578 131.904,52.532 C59.1@131.869,52.497 ; C61.1@131.188,37.973 128.143,41.018 128.143,46.609 130.556,49.022 130.556,50.216 130.974,50.634 R157.2@131.904,50.634 ; C63.1@131.569,23.241 131.95,21.729 R177.2@131.953,21.717 ; R177.2@131.95,21.72 R177.2@131.953,21.717 ; R177.2@131.953,21.297 R177.2@131.953,21.717 ; v1@42.139,35.408 42.139,42.164 ; 42.139,42.164 42.396,42.421 C48.2@43.561,42.421 42.139,42.164 ; C59.1@131.869,52.497 R157.2@131.904,50.634 ; C59.1@131.869,52.497 131.904,52.461 R157.2@131.904,50.634
  Top Layer w0.7: C9.1@30.226,29.086 C9.1@30.734,29.086 33.017,29.086 33.084,29.019 U3.16@33.084,27.927 U3.16@33.084,26.94 ; C48.2@43.561,42.421 43.561,44.701 C5.1@43.688,44.828
  Top Layer w1: C3.1@12.827,29.467 13.843,30.483 v1(13.843,31.75) ; v1(16.51,33.934) 16.51,36.195 4.088,48.617 4.088,72.414 4.953,73.279 24.003,73.279 27.432,76.708 27.432,91.44 28.321,92.329 32.004,92.329 36.703,97.028 45.426,97.028 L3.2@51.395,91.059 ; v1(22.352,34.303) 22.352,32.346 R13.2@22.86,31.838 24.328,31.838 v1(24.892,31.274) ; R31.2@51.22,32.258 R112.1@51.22,33.782 ; v1(52.644,73.091) 54.102,74.549 58.547,74.549 59.928,75.93 C83.1@59.928,77.47 60.833,77.47 63.627,74.676 63.627,71.247 62.608,70.228 C65.2@60.96,70.228 ; 57.072,48.133 61.644,52.705 C11.1@70.104,52.705 ; U6.20@70.104,50.038 C11.1@70.104,53.21 68.075,53.21 67.906,53.379 67.906,57.365 68.834,58.293 72.517,58.293 74.803,56.007 82.042,56.007 83.058,57.023 v1(83.058,58.674) ; R48.2@71.501,3.876 R50.2@74.005,3.876 R53.2@76.581,3.876 R52.2@79.121,3.876 R64.2@84.201,3.876 R66.2@86.741,3.876 R68.2@89.281,3.876 R70.2@91.821,3.876 R80.2@96.901,3.876 R82.2@99.441,3.876 R84.2@101.981,3.876 R86.2@104.521,3.876 R96.2@109.601,3.876 R98.2@112.141,3.876 R100.2@114.681,3.876 v1@119.507,3.876 ; C20.1@86.614,53.21 U7.20@86.614,50.038 92.996,50.038 ; v1(88.9,61.214) 88.9,64.846 v1(88.951,64.897) ; U8.20@103.124,50.038 C29.1@103.124,53.21 ; U9.20@119.634,50.038 C38.1@119.634,53.21 ; v1(126.365,68.961) v1@129.946,68.961 ; v1@127.127,31.547 127.127,25.959 129.845,23.241 C63.1@131.569,23.241 ; v1(127.283,75.311) 127.283,79.15 129.413,81.28 131.738,81.28 R139.2@131.904,81.114 131.904,83.266 C55.1@132.204,83.566 ; C57.1@131.253,67.629 131.315,67.567 131.444,67.439 131.444,66.651 131.444,66.334 ; C59.1@131.805,52.56 131.885,52.64 131.904,52.659 131.904,52.621 131.904,52.532 C59.1@131.904,52.461 ; R177.2@131.95,21.3 131.95,21.72 131.95,21.729 C63.1@131.95,23.495
  Bottom Layer w0.5: v1(13.843,31.75) v1@13.931,31.838 ; v1(16.51,33.934) v1@16.51,34.036 ; v1@27.178,31.928 v1@27.178,32.004 ; v1(41.758,34.976) 41.859,34.976 v1(41.859,31.521) 43.205,31.521 45.466,33.782 45.466,34.036 ; U5.16@41.91,27.927 41.91,26.645 42.647,25.908 45.009,25.908 v1(45.212,26.111) ; C7.1@43.561,37.722 44.425,37.722 44.562,37.859 U10.16@45.466,37.859 45.466,34.036 ; v1(49.733,32.258) 49.682,32.207 48.362,33.528 45.974,33.528 45.466,34.036 ; 53.228,66.04 53.228,65.786 83.083,65.786 86.258,68.961 91.821,68.961 96.622,73.762 96.622,79.223 99.703,82.304 126.5,82.304 128.651,84.455 U17.16@131.458,84.455 ; 85.573,68.275 85.573,67.462 88.138,64.897 v1(88.951,64.897) ; U9.20@119.634,49.596 U9.20@119.634,50.038 ; v1(129.286,54.61) U19.16@131.458,54.61 ; v1@129.413,39.751 U20.16@131.458,39.751 ; v1(129.921,69.088) 129.819,69.088 129.642,69.266 129.718,69.342 U18.16@131.458,69.342
  Bottom Layer w0.7: U1.16@24.13,27.927 24.13,28.956 24.26,29.086 C1.1@27.178,29.086 ; U9.20@119.634,49.596 121.351,47.879 124.485,47.879 125.857,46.507 125.857,32.791 v1(127.102,31.547)
  Bottom Layer w1: v1(13.843,31.75) 16.422,31.75 R4.2@16.51,31.838 v1(16.51,33.934) ; v1@16.51,34.036 22.085,34.036 v1(22.352,34.303) ; v1(24.892,31.274) 25.545,31.928 v1@27.178,31.928 ; C1.1@27.178,29.086 v1(27.178,31.838) R42.2@34.29,31.838 ; R42.2@34.29,31.928 v1(35.306,32.944) ; v1(52.644,73.091) R220.2@52.644,69.215 52.644,66.624 53.228,66.04 ; U25.3@66.856,93.486 66.743,93.599 64.386,93.599 C80.2@63.5,92.713 61.679,92.713 C79.1@60.579,93.813 57.825,91.059 L3.2@51.395,91.059 51.395,82.275 R219.1@52.644,81.026 52.644,80.325 53.975,78.994 59.182,78.994 59.928,78.248 C83.1@59.928,77.47 60.182,77.216 TR1.4@67.818,77.216 ; U6.20@70.104,50.038 72.644,52.578 84.074,52.578 U7.20@86.614,50.038 ; R55.2@71.501,3.876 R49.2@74.005,3.876 R54.2@76.581,3.876 R51.2@79.121,3.876 R71.2@84.201,3.876 R65.2@86.741,3.876 R67.2@89.281,3.876 R69.2@91.821,3.876 R87.2@96.901,3.876 R81.2@99.441,3.876 R83.2@101.981,3.876 R85.2@104.521,3.876 R103.2@109.601,3.876 R97.2@112.141,3.876 R99.2@114.681,3.876 R101.2@117.221,3.876 121.275,3.876 125.857,8.458 125.857,22.098 128.016,24.257 U21.16@131.458,24.257 ; v1(83.058,58.674) 83.058,59.944 84.074,60.96 88.646,60.96 v1(88.9,61.214) ; v1(126.365,68.961) 126.631,69.227 126.631,74.659 v1(127.283,75.311)
  other v1: 119.507,3.81 81.534,3.876 94.615,3.876 106.934,3.876 128.778,24.308 129.667,39.751
+24V_SKC: C71.1 C72.1 C74.2 C76.2 P12.10 Q4.2 Q5.2 Q6.2 Q7.2 Q16.2 Q17.2 Q18.2 Q19.2 R184.2 R185.2 R186.2 R187.2 R188.2 R189.2 R190.2 R191.2 R210.1 R214.1 R215.1 U23.2 U24.6 | length 208.5
  Top Layer w0.5: R188.2@8.448,50.165 8.448,51.755 11.43,54.737 ; 15.24,54.737 13.529,53.026 13.529,51.355 14.181,50.702 Q5.2@14.181,46.008 14.181,41.699 14.529,41.351 v1(16.027,41.351) ; Q4.2@18.136,46.008 18.136,50.105 17.55,50.691 17.55,52.983 19.304,54.737 ; Q7.2@22.091,46.008 22.091,51.069 21.391,51.769 21.391,53.848 22.28,54.737 ; Q6.2@26.047,46.008 26.047,48.363 25.429,48.98 25.429,52.734 R187.2@27.432,54.737 ; P12.10@29.972,41.148 33.957,45.133 Q19.2@33.957,46.008 ; Q17.2@30.002,46.008 30.002,54.737 ; 43.053,52.197 43.18,52.07 43.749,51.501 R190.2@43.749,50.292
  Top Layer w0.7: Q18.2@37.912,46.008 37.912,51.247 38.862,52.197 43.053,52.197 ; C71.1@43.18,55.92 43.18,52.07 43.401,51.849
  Top Layer w1: R188.2@8.448,50.165 8.448,47.786 Q16.2@10.019,46.214 ; 11.684,54.864 37.338,54.864 38.862,53.34 38.862,52.197 ; R187.2@27.94,54.798 27.94,57.359 C72.1@30.607,60.026 ; C72.1@30.692,60.111 C72.1@30.607,60.026 ; R215.1@40.962,95.25 43.561,92.651 43.561,82.863 R214.1@41.021,80.323 45.593,75.751 U23.2@45.593,67.691 45.593,66.675 44.577,65.659 34.671,65.659 30.607,61.595 C72.1@30.607,60.026 ; R190.2@43.749,50.292 45.59,50.292 C74.2@45.844,50.038
  Bottom Layer w0.5: v1(16.027,41.351) 17.501,39.878 28.702,39.878 P12.10@29.972,41.148
  Bottom Layer w1: U24.6@34.925,90.17 34.925,94.742 36.449,96.266 39.946,96.266 R215.1@40.962,95.25 ; R214.1@41.021,80.323 C76.2@41.021,82.547 ; U23.2@45.593,67.691 45.593,69.911 R210.1@46.167,70.485
BCD_DISPLAY_TENS_1: P13.5
BCD_DISPLAY_TENS_2: P13.6
BCD_DISPLAY_TENS_4: P13.7
BCD_DISPLAY_TENS_8: P13.8
BCD_DISPLAY_UNITS_1: P13.1
BCD_DISPLAY_UNITS_2: P13.2
BCD_DISPLAY_UNITS_4: P13.3
BCD_DISPLAY_UNITS_8: P13.4
BCD_DISPLAY_VCC: P13.10
BCD_DISPLAY_VSS: P13.9
DISP1_LATCH: U12.2 U17.12 | length 36.5
  Bottom Layer w0.5: U12.2@114.046,57.553 114.046,56.337 114.579,55.804 116.484,55.804 120.066,59.385 120.066,68.047 123.139,71.12 125.197,71.12 125.603,71.526 125.603,76.327 128.651,79.375 U17.12@131.458,79.375
DISP1_SEG_A: P7.11 R136.2 | length 2.3
  Bottom Layer w1: P7.11@156.828,72.39 156.828,74.698 R136.2@156.845,74.715
DISP1_SEG_B: P7.10 R137.2 | length 2.3
  Bottom Layer w1: P7.10@154.288,72.39 154.288,74.698 R137.2@154.305,74.715
DISP1_SEG_C: P7.9 R138.2 | length 2.3
  Bottom Layer w1: P7.9@151.748,72.39 151.748,74.698 R138.2@151.765,74.715
DISP1_SEG_D: P7.8 R140.2 | length 2.3
  Bottom Layer w1: P7.8@149.208,72.39 149.208,74.698 R140.2@149.225,74.715
DISP1_SEG_DP: P7.4 R144.2 | length 2.3
  Bottom Layer w1: P7.4@139.048,72.39 139.048,74.698 R144.2@139.065,74.715
DISP1_SEG_E: P7.7 R141.2 | length 2.3
  Bottom Layer w1: P7.7@146.668,72.39 146.668,74.698 R141.2@146.685,74.715
DISP1_SEG_F: P7.6 R142.2 | length 2.3
  Bottom Layer w1: P7.6@144.128,72.39 144.128,74.698 R142.2@144.145,74.715
DISP1_SEG_G: P7.5 R143.2 | length 2.3
  Bottom Layer w1: P7.5@141.588,72.39 141.588,74.698 R143.2@141.605,74.715